# EAGLE board do_an_1 (EAGLE 9.0.1)
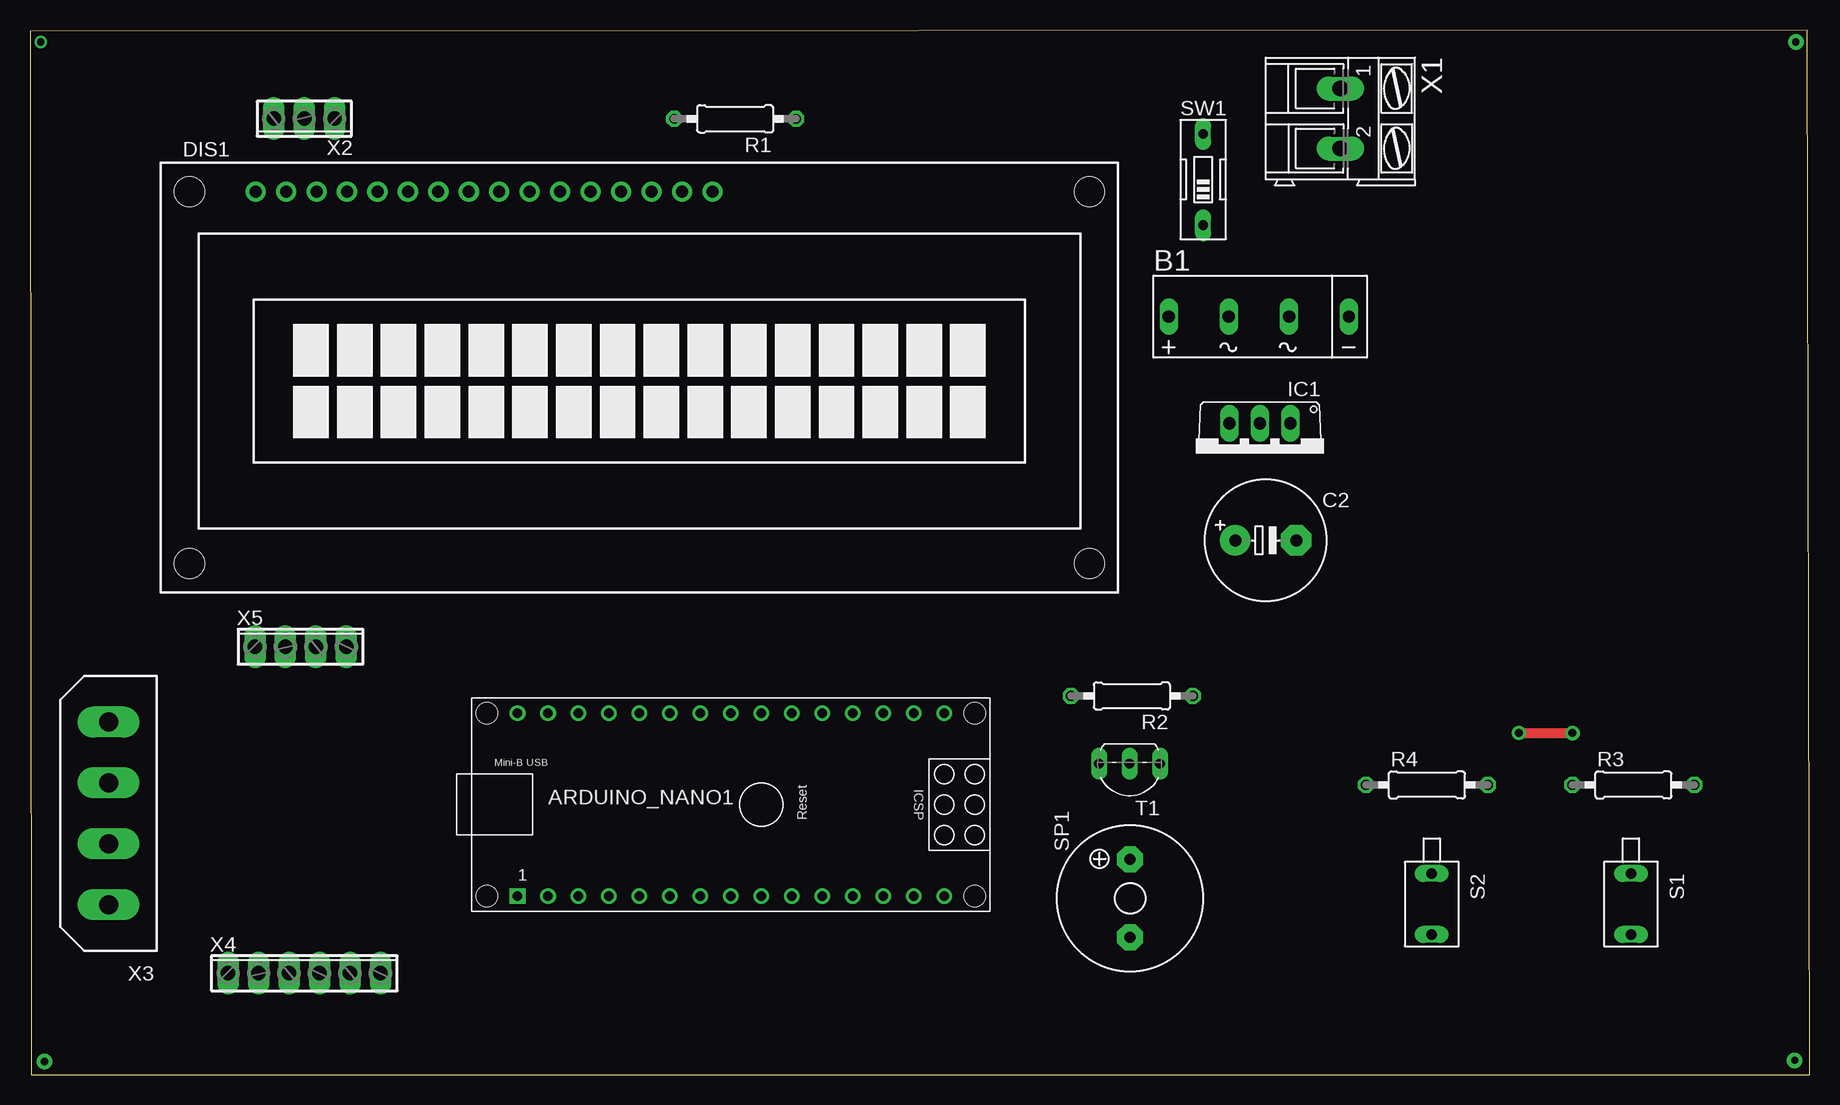
[diagram p0: board, top side]
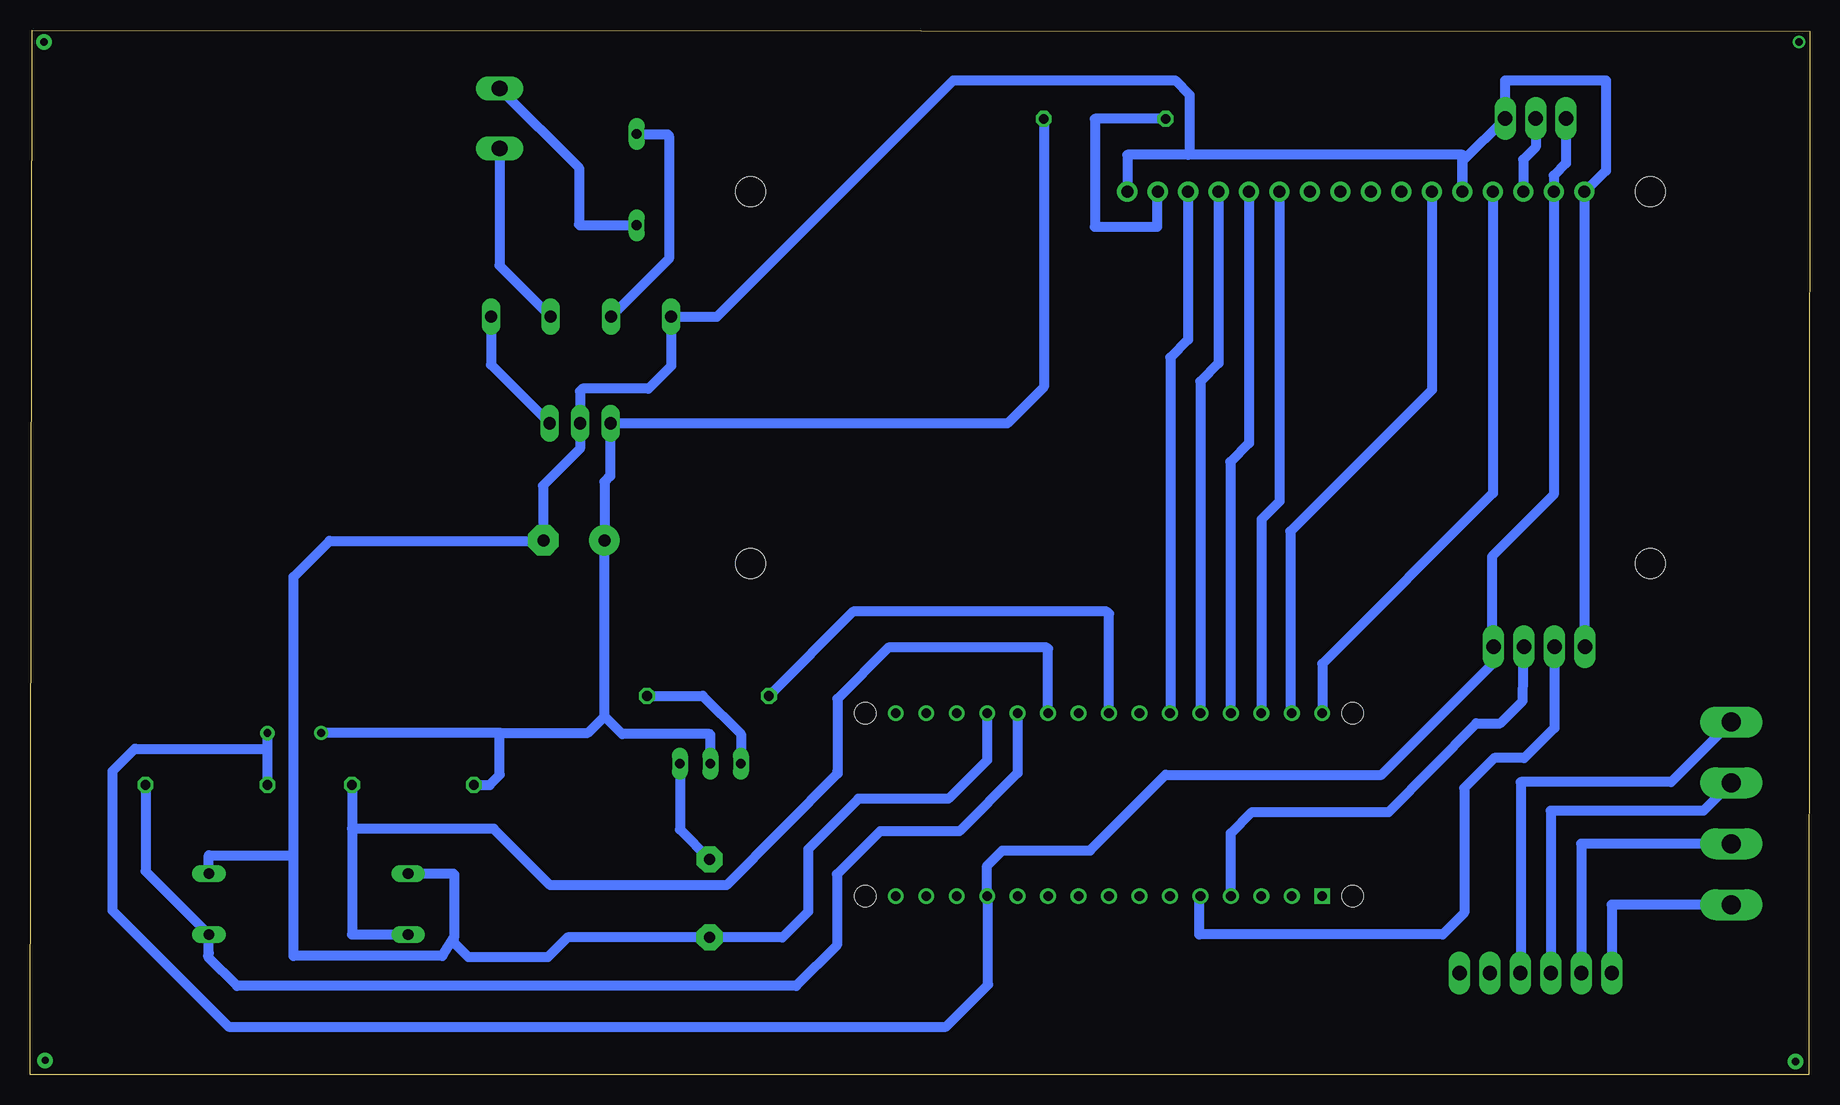
[diagram p1: board, bottom side, seen from below]

Size 148.36 x 87.1 mm. Coordinates in mm from the lower left corner, seen from the top.
Outline: 0.1,0 148.36,0 148.16,87.1 0,87 0.1,0
Copper layers (1*16): Top 0.035mm / dielectric 1.5mm / Bottom 0.035mm
Design rules "default *": minimum track width 30mil, minimum drill 0.8mm, track to track 30mil, track to pad 20mil, pad to pad 20mil, via to via 20mil, smd to smd 6mil, copper to edge 40mil, drill to drill 6mil, minimum pad ring 10mil, minimum via ring 8mil, stop-mask expansion 4mil, vias tented up to drill 0mil, thermal gap 10mil

## Footprints (pad centres in the part's own frame; a part is rotated, then mirrored left to right if it is on the bottom)
ARDUINO_NANO = drill 0.8 square: 1 -20.32,-7.62 | drill 0.8: 2 -17.78,-7.62; 3 -15.24,-7.62; 4 -12.7,-7.62; 5 -10.16,-7.62; 6 -7.62,-7.62; 7 -5.08,-7.62; 8 -2.54,-7.62; 9 0,-7.62; 10 2.54,-7.62; 11 5.08,-7.62; 12 7.62,-7.62; 13 10.16,-7.62; 14 12.7,-7.62; 15 15.24,-7.62; 16 15.24,7.62; 17 12.7,7.62; 18 10.16,7.62; 19 7.62,7.62; 20 5.08,7.62; 21 2.54,7.62; 22 0,7.62; 23 -2.54,7.62; 24 -5.08,7.62; 25 -7.62,7.62; 26 -10.16,7.62; 27 -12.7,7.62; 28 -15.24,7.62; 29 -17.78,7.62; 30 -20.32,7.62 | hole 1.778: -22.86,-7.62; -22.86,7.62; 17.78,7.62; 17.78,-7.62
2KBB-R = drill 1.016 long: + -7.62,0; - 7.391,0; AC1 -2.616,0; AC2 2.413,0
E5-10,5 = drill 1.016 pad 2.54: + -2.54,0 | drill 1.016 pad 2.54 octagon: - 2.54,0
TUXGR_16X2_R2 = drill 1 pad 1.676: 1 -32,15.5; 2 -29.46,15.5; 3 -26.92,15.5; 4 -24.38,15.5; 5 -21.84,15.5; 6 -19.3,15.5; 7 -16.76,15.5; 8 -14.22,15.5; 9 -11.68,15.5; 10 -9.14,15.5; 11 -6.6,15.5; 12 -4.06,15.5; 13 -1.52,15.5; 14 1.02,15.5; 15 3.56,15.5; 16 6.1,15.5 | hole 2.5: -37.5,-15.5; 37.5,-15.5; -37.5,15.5; 37.5,15.5
TO220V = drill 1.016 long: 1 -2.54,-2.54; 2 0,-2.54; 3 2.54,-2.54
0207/10 = drill 0.813 octagon: 1 -5.08,0; 2 5.08,0
GP11MCBE = drill 0.889 long: 1 0,-2.54; 3 0,2.54
KSS1201 = drill 0.914 pad 2.159 octagon: + 3.251,0; - -3.251,0
EDG-01 = drill 0.813 long: 1 0,-3.81; 2 0,3.81
TO92-ECB = drill 0.813 long: B 2.54,0; C 0,0; E -2.54,0
AK300/2 = drill 1.321 long: 1 -2.515,0; 2 2.489,0
3POL254 = drill 1.2 long: 1 -2.54,0; 2 0,0; 3 2.54,0
9090-4V = drill 1.6 pad 2.6 long: 1 -7.62,0; 2 -2.54,0; 3 2.54,0; 4 7.62,0
6POL254 = drill 1.2 pad 1.778 long: 1 -6.35,0; 2 -3.81,0; 3 -1.27,0; 4 1.27,0; 5 3.81,0; 6 6.35,0
4POL254 = drill 1.2 long: 1 -3.81,0; 2 -1.27,0; 3 1.27,0; 4 3.81,0

## Placement (x,y rotation side)
ARDUINO_NANO1  [ARDUINO_NANO]  60.96,22.52 0 top
B1  [2KBB-R]  102.54,63.2 0 top
C2  [E5-10,5]  103.01,44.55 0 top
DIS1  TUXGR_16X2_R2  [TUXGR_16X2_R2]  50.8,58.12 0 top
IC1  7805TV  [TO220V]  102.51,51.77 180 top
R1  330  [0207/10]  58.78,79.69 180 top
R2  1k2  [0207/10]  91.85,31.58 180 top
R3  10k  [0207/10]  133.65,24.16 0 top
R4  10k  [0207/10]  116.44,24.16 0 top
S1  GF11MCBE  [GP11MCBE]  133.45,14.23 180 top
S2  GF11MCBE  [GP11MCBE]  116.84,14.23 180 top
SP1  KSS1201  [KSS1201]  91.7,14.7 90 top
SW1  [EDG-01]  97.79,74.63 0 top
T1  2SC1815  [TO92-ECB]  91.65,25.93 180 top
X1  [AK300/2]  109.22,79.71 270 top
X2  [3POL254]  22.86,79.71 180 top
X3  9090-4V  [9090-4V]  6.55,21.79 90 top
X4  [6POL254]  22.86,8.46 0 top
X5  [4POL254]  22.56,35.69 0 top

## Library data of the parts
ARDUINO_NANO1 = ArduinoNanoV30
B1 = rectifier
C2 = rcl; SPICEPREFIX: C
DIS1 = display-lcd; OC_FARNELL: unknown; OC_NEWARK: unknown
IC1 = linear
R1-R4 = rcl; SPICEPREFIX: R
S1 S2 = gp_10; MF: C&K Components; MPN: GF11MCBE; OC_FARNELL: unknown; OC_NEWARK: 39M9588
SP1 = buzzer; OC_FARNELL: unknown; OC_NEWARK: unknown
SW1 = special
T1 = transistor
X1 = con-ptr500; OC_FARNELL: unknown; OC_NEWARK: unknown
X2 X4 X5 = con-phoenix-254; OC_FARNELL: unknown; OC_NEWARK: unknown
X3 = con-thomas-betts; OC_FARNELL: unknown; OC_NEWARK: unknown

## Nets
A0: ARDUINO_NANO1.4 X5.3
A1: ARDUINO_NANO1.5 X5.2
BT1: ARDUINO_NANO1.20 R3.2 S1.3
BT2: ARDUINO_NANO1.21 R4.2 S2.3
D4: ARDUINO_NANO1.28 DIS1.11
D5: ARDUINO_NANO1.27 DIS1.12
D6: ARDUINO_NANO1.26 DIS1.13
D7: ARDUINO_NANO1.25 DIS1.14
E: ARDUINO_NANO1.29 DIS1.6
GND: ARDUINO_NANO1.14
GNDA: ARDUINO_NANO1.19 B1.+ C2.- DIS1.1 DIS1.5 DIS1.16 IC1.2 S1.1 S2.1 SP1.- X2.1 X5.1
LOA: ARDUINO_NANO1.23 R2.2
N$1: R2.1 T1.B
N$2: B1.AC1 SW1.2
N$3: B1.AC2 X1.2
N$4: B1.- IC1.1
N$5: DIS1.3 X2.2
N$6: DIS1.15 R1.2
N$7: X3.1 X4.1
N$8: X3.2 X4.2
N$9: SP1.+ T1.E
N$11: X3.3 X4.3
N$12: X3.4 X4.4
N$14: SW1.1 X1.1
RS: ARDUINO_NANO1.30 DIS1.4
VCC: ARDUINO_NANO1.12 C2.+ DIS1.2 IC1.3 R1.1 R3.1 R4.1 T1.C X2.3 X5.4
VIN: ARDUINO_NANO1.15

## Tracks (layer width: path | path; a pad name or v marks a point on that pad's centre or on a via)
A0
  Bottom 0.813: ARDUINO_NANO1.4 48.26,20.14 46.5,21.9 35.1,21.9 27.8,29.3 25.8,29.3 23.93,31.17 X5.3
A1
  Bottom 0.813: X5.2 21.29,28.91 23.8,26.4 26.3,26.4 28.8,23.9 28.8,13.5 30.6,11.7 50.9,11.7 50.9,14.8 ARDUINO_NANO1.5
BT1
  Bottom 0.813: R3.2 138.73,16.97 S1.3 133.45,10.15 133.5,9.8 131.1,7.4 84.5,7.4 81.1,10.8 81.1,16.71 79.4,18.4 77.5,20.3 70.9,20.3 66.04,25.16 ARDUINO_NANO1.20
BT2
  Bottom 0.813: R4.2 121.52,20.5 | 121.52,20.5 121.52,11.69 S2.3 | ARDUINO_NANO1.21 63.5,35.5 63.6,35.6 76.8,35.6 81.05,31.35 81.05,25.3 81.04,25.12 90.3,15.8 105,15.8 109.7,20.5 121.52,20.5
D4
  Bottom 0.813: DIS1.11 44.2,47.8 45.7,46.3 45.7,30.16 ARDUINO_NANO1.28
D5
  Bottom 0.813: DIS1.12 46.74,52.66 48.3,51.1 48.3,30.18 ARDUINO_NANO1.27
D6
  Bottom 0.813: DIS1.13 49.28,59.32 50.8,57.8 ARDUINO_NANO1.26
D7
  Bottom 0.813: DIS1.14 51.82,61.28 53.3,59.8 53.3,30.18 ARDUINO_NANO1.25
E
  Bottom 0.813: DIS1.6 31.5,57.1 43.3,45.3 43.3,30.26 ARDUINO_NANO1.29
GNDA
  Bottom 0.813: 105.6,44.6 105.6,49.1 102.51,52.19 IC1.2 102.51,56.99 102.3,57.2 96.8,57.2 94.92,59.08 B1.+ 91.1,63.2 71.4,82.9 52.9,82.9 51.7,81.7 51.7,76.8 51.8,76.7 | 105.6,44.6 C2.- | 51.8,76.7 28.96,76.7 DIS1.5 28.96,76.15 X2.1 25.4,82.9 17,82.9 17,75.37 18.75,73.62 | 51.8,76.7 56.9,76.7 DIS1.16 | X5.1 18.75,73.62 | 18.75,73.62 DIS1.1 | S2.1 113.07,16.77 113,16.7 113,11.5 | 113,11.5 114,9.9 126.4,9.9 126.4,18.3 | 105.6,44.6 105.7,44.5 123.4,44.5 126.4,41.5 126.4,18.3 | S1.1 133.45,18.3 126.4,18.3 | ARDUINO_NANO1.19 68.58,26.22 71.8,23 79.3,23 83.5,18.8 83.5,13.6 85.65,11.45 SP1.- 103.55,11.45 105.2,9.8 111.8,9.8 113,11 113,11.5
LOA
  Bottom 0.813: ARDUINO_NANO1.23 58.42,38.42 58.6,38.6 79.75,38.6 R2.2
N$1
  Bottom 0.813: R2.1 92.28,31.58 89.1,28.4 89.11,28.39 T1.B
N$2
  Bottom 0.813: SW1.2 arc-90 97.75,78.4 95.3,78.4 arc90 95.1,78.2 95.1,68.02 B1.AC1
N$3
  Bottom 0.813: X1.2 109.22,67.47 B1.AC2
N$4
  Bottom 0.813: B1.- 109.93,59.19 IC1.1
N$5
  Bottom 0.813: X2.2 22.86,77.34 23.9,76.3 23.9,73.64 DIS1.3
N$6
  Bottom 0.813: R1.2 59.6,79.69 59.6,70.7 54.4,70.7 54.4,73.62 DIS1.15
N$7
  Bottom 0.813: X3.1 16.51,14.17 X4.1
N$8
  Bottom 0.813: X3.2 19.05,19.25 X4.2
N$9
  Bottom 0.813: T1.E 94.19,20.44 SP1.+
N$11
  Bottom 0.813: X3.3 8.88,22 21.6,22 X4.3
N$12
  Bottom 0.813: X3.4 11.56,24.4 24.1,24.4 24.1,8.49 X4.4
N$14
  Bottom 0.813: X1.1 102.6,75.61 102.6,70.9 102.52,70.82 SW1.1
N$16  (via drill 0.6 pad 0.8)
  other vias: 0.9,86.1
N$17  (via drill 0.6 pad 1.3)
  other vias: 1.2,1.1
N$18  (via drill 0.6 pad 1.3)
  other vias: 147.1,1.2
N$19  (via drill 0.6 pad 1.3)
  other vias: 147.2,86.1
RS
  Bottom 0.813: DIS1.4 26.42,48.48 40.64,34.26 ARDUINO_NANO1.30
VCC  (via drill 0.65 pad 1.15, 0.65 pad 1.2)
  Top 0.813: v124.1,28.5 128.56,28.5 v128.57,28.48
  Bottom 0.813: IC1.3 | X2.3 20.32,75.98 21.34,74.96 DIS1.2 21.34,48.36 26.5,43.2 26.5,35.82 | R1.1 63.86,57.34 66.9,54.3 IC1.3 | IC1.3 100,54.28 100,49.9 100.47,49.43 C2.+ 100.47,29.87 | T1.C 91.65,28.35 91.7,28.4 99,28.4 100.47,29.87 | R4.1 110.04,24.16 109.2,25 109.2,28.5 | 109.2,28.5 101.84,28.5 100.47,29.87 | 109.2,28.5 v124.1,28.5 | 128.57,27.17 R3.1 | 26.5,35.82 X5.4 | 26.5,35.82 26.5,34.21 35.71,25 53.7,25 60,18.7 67.3,18.7 68.58,17.42 ARDUINO_NANO1.12 68.5,14.82 68.5,7.5 72,4 131.8,4 141.5,13.7 141.5,25.3 139.6,27.2 139.57,27.17 128.57,27.17 | v128.57,28.48 128.57,27.17